# EAGLE board hap (EAGLE 7.1.0)
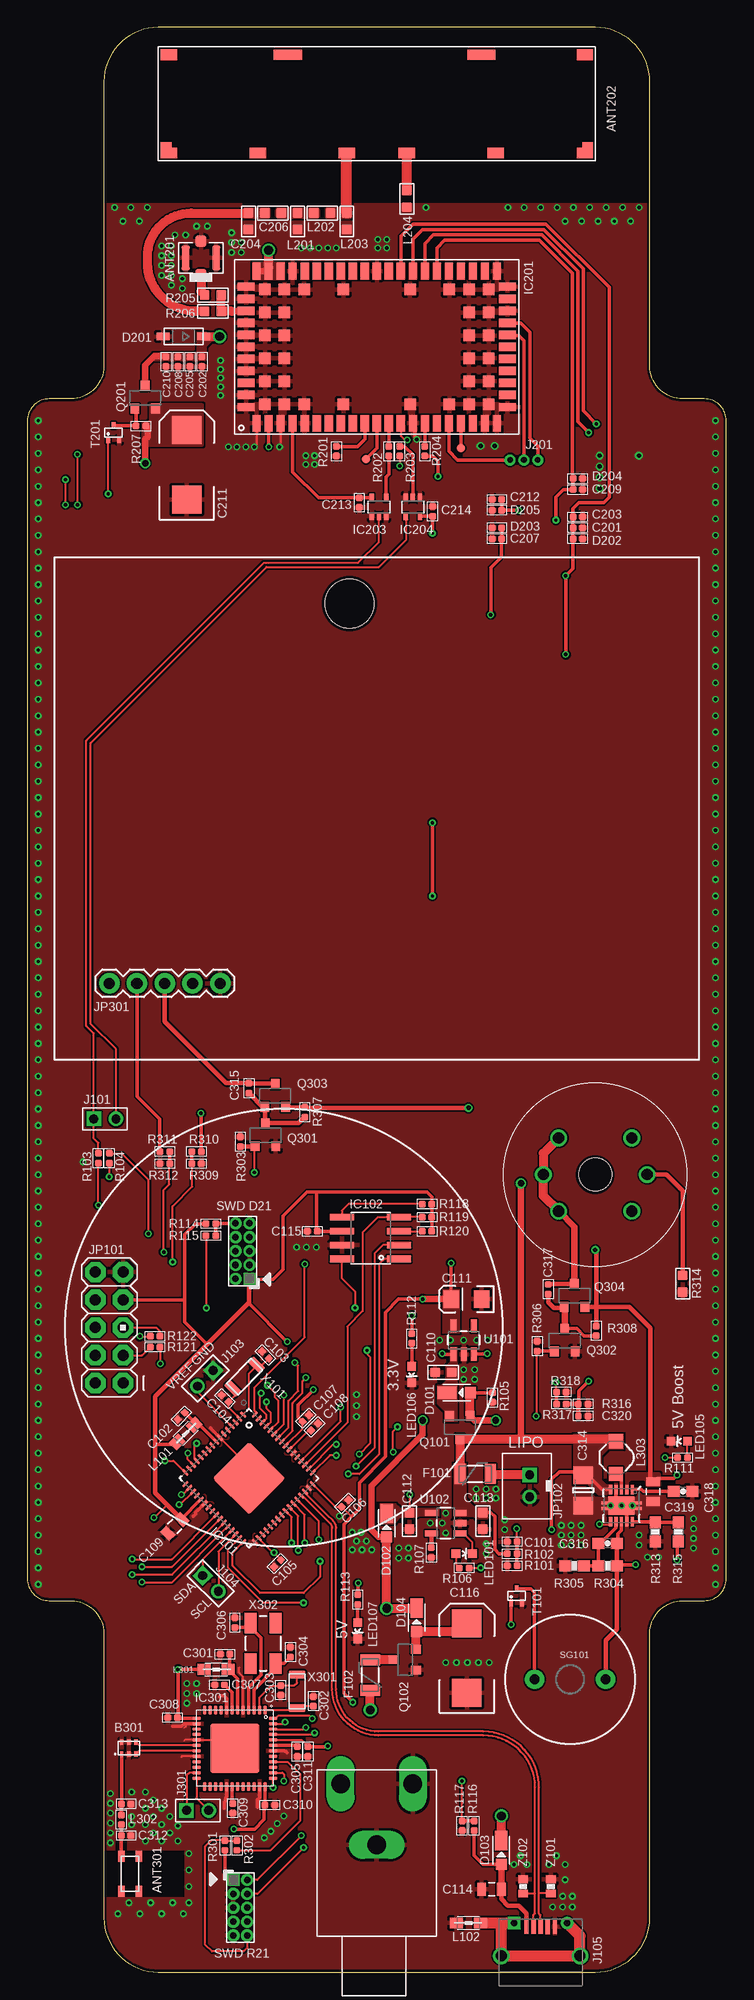
[diagram p0: board, top side]
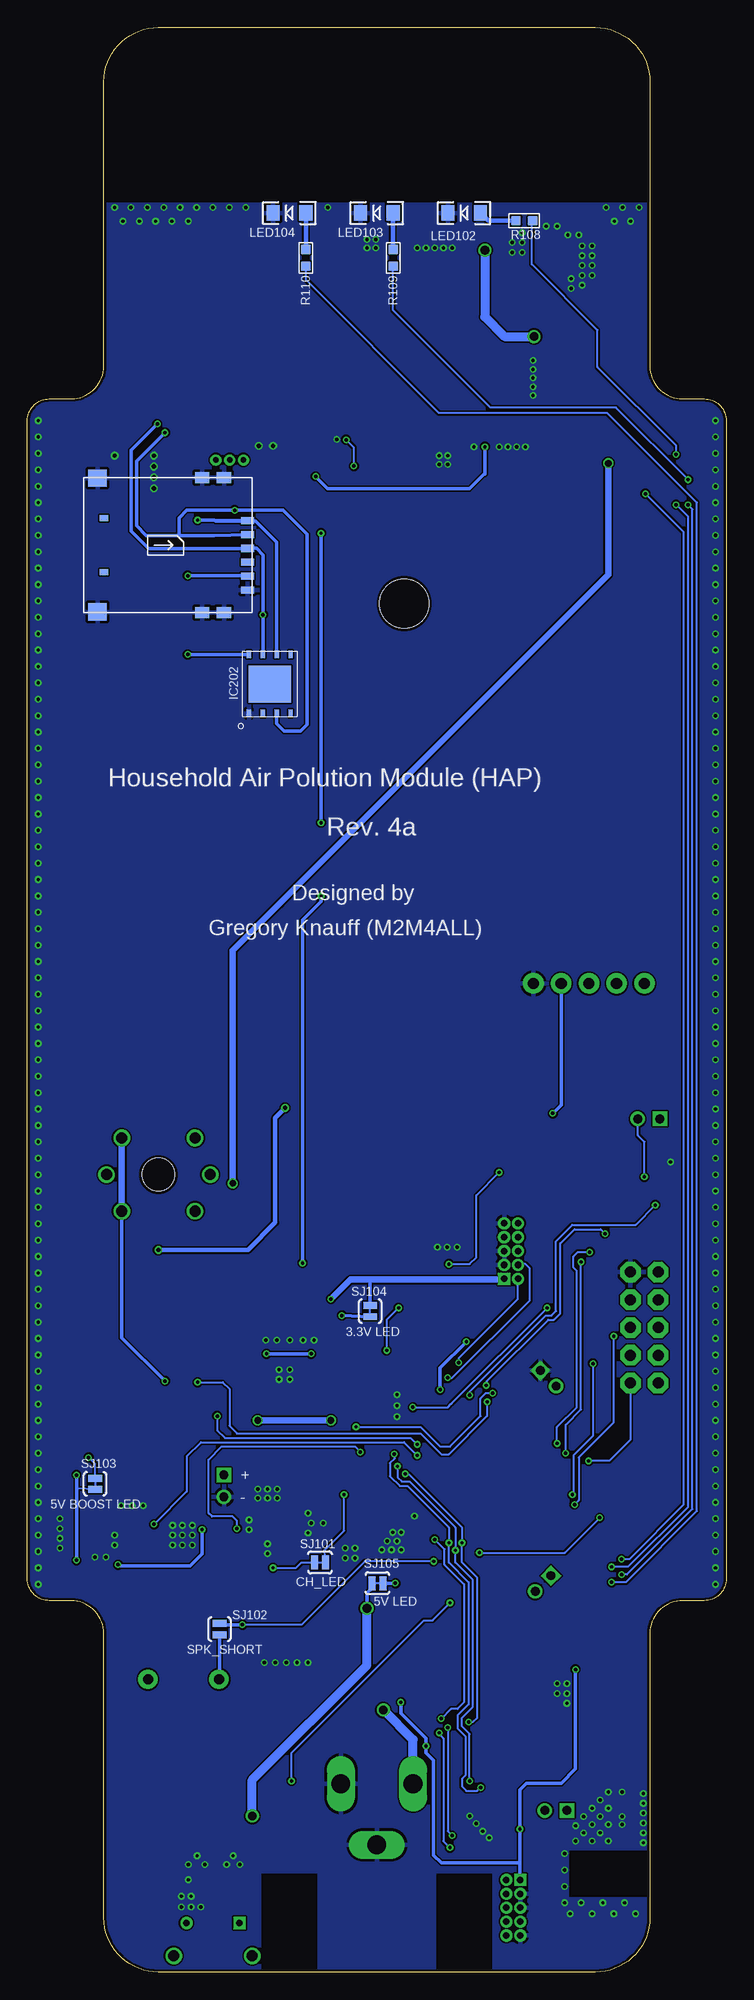
[diagram p1: board, bottom side, seen from below]

Size 64 x 178 mm. Coordinates in mm from the lower left corner, seen from the top.
Outline: 7,173 7,147 arc-90 4,144 2,144 arc90 0,142 0,36 arc90 2,34 4,34 arc-90 7,31 7,5 arc90 12,0 52,0 arc90 57,5 57,31 arc-90 60,34 62,34 arc90 64,36 64,142 arc90 62,144 60,144 arc-90 57,147 57,173 arc90 52,178 12,178 arc90 7,173
Copper layers (1*16): Top 0.035mm / dielectric 1.5mm / Bottom 0.035mm
Design rules "SeeedStudio_2layer_DRU_no_angle_20140221": minimum track width 6mil, minimum drill 12mil, track to track 6mil, track to pad 6mil, pad to pad 6mil, via to via 6mil, smd to smd 0mil, copper to edge 10mil, drill to drill 10mil, minimum pad ring 10mil, minimum via ring 6mil, stop-mask expansion 2mil, vias tented up to drill 100mil, thermal gap 10mil
Holes 4.5 mm at 29.5,125.25
tKeepout: area 0,34 to 2,144; area 62,34 to 64,144

## Footprints (pad centres in the part's own frame; a part is rotated, then mirrored left to right if it is on the bottom)
4P-U-FL = smd 1.016 x 1.016: D -1.524,0; GND3 1.524,0 | smd 2.286 x 0.762: GND1 0,1.397; GND2 0,-1.397
A10393 = smd 1 x 1.5: 1 4.5,-2.745; 2 4.5,2.745; 3 4.5,10.895; 4 4.5,-10.895; 5 4.5,-19.05; 8 4.5,19.05; 9 -4.5,-19.05; 10 -4.5,19.05 | smd 1.5 x 1: 6 4.25,-19.3; 7 4.25,19.3 | smd 0.9 x 2.6: 11 -4.5,9.58; 12 -4.5,-8.14
2450AT18D0100 = smd 1 x 0.6: 1 -1.6,-0.8; 2 1.6,-0.8; 3 1.6,0.8; 4 -1.6,0.8
BALUN = smd 0.3 x 0.5: 1 -0.65,-0.55; 2 0,-0.55; 3 0.65,-0.55; 4 0.65,0.55; 5 0,0.55; 6 -0.65,0.55
C0402 = smd 0.635 x 0.635: 1 -0.445,0; 2 0.445,0
0805 = smd 0.8 x 1.2: 1 -0.9,0; 2 0.9,0
C0603 = smd 0.889 x 0.889: 1 -0.762,0; 2 0.762,0
EIA3216 = smd 1.4 x 1.6: A 1.4,0; C -1.4,0
EIA7343 = smd 2.55 x 2.7: A 3.17,0; C -3.17,0
1206 = smd 1.6 x 1.8: 1 -1.4,0; 2 1.4,0
0603-CAP = smd 1.1 x 1: 1 -0.85,0; 2 0.85,0
PINHEAD_2X05_127 = drill 0.6 pad 1.016 square: 1 -0.635,2.54 | drill 0.6 pad 1.016: 2 0.635,2.54; 3 -0.635,1.27; 4 0.635,1.27; 5 -0.635,0; 6 0.635,0; 7 -0.635,-1.27; 8 0.635,-1.27; 9 -0.635,-2.54; 10 0.635,-2.54
D1005 = smd 1.016 x 1.016: + -1.27,0 | smd 1.778 x 1.143: - 0.889,0
SOD-123 = smd 1.2 x 0.7: A 1.85,0; C -1.85,0
R0402 = smd 0.635 x 0.635: 1 -0.445,0; 2 0.445,0
PTC-1206 = smd 1 x 1.8: 1 -1.4,0; 2 1.4,0
QFN64 = smd 4.7 x 4.7: 0 0,0 | smd 0.7 x 0.25: 1 -4.5,3.75; 2 -4.5,3.25; 3 -4.5,2.75; 4 -4.5,2.25; 5 -4.5,1.75; 6 -4.5,1.25; 7 -4.5,0.75; 8 -4.5,0.25; 9 -4.5,-0.25; 10 -4.5,-0.75; 11 -4.5,-1.25; 12 -4.5,-1.75; 13 -4.5,-2.25; 14 -4.5,-2.75; 15 -4.5,-3.25; 16 -4.5,-3.75; 33 4.5,-3.75; 34 4.5,-3.25; 35 4.5,-2.75; 36 4.5,-2.25; 37 4.5,-1.75; 38 4.5,-1.25; 39 4.5,-0.75; 40 4.5,-0.25; 41 4.5,0.25; 42 4.5,0.75; 43 4.5,1.25; 44 4.5,1.75; 45 4.5,2.25; 46 4.5,2.75; 47 4.5,3.25; 48 4.5,3.75 | smd 0.25 x 0.7: 17 -3.75,-4.5; 18 -3.25,-4.5; 19 -2.75,-4.5; 20 -2.25,-4.5; 21 -1.75,-4.5; 22 -1.25,-4.5; 23 -0.75,-4.5; 24 -0.25,-4.5; 25 0.25,-4.5; 26 0.75,-4.5; 27 1.25,-4.5; 28 1.75,-4.5; 29 2.25,-4.5; 30 2.75,-4.5; 31 3.25,-4.5; 32 3.75,-4.5; 49 3.75,4.5; 50 3.25,4.5; 51 2.75,4.5; 52 2.25,4.5; 53 1.75,4.5; 54 1.25,4.5; 55 0.75,4.5; 56 0.25,4.5; 57 -0.25,4.5; 58 -0.75,4.5; 59 -1.25,4.5; 60 -1.75,4.5; 61 -2.25,4.5; 62 -2.75,4.5; 63 -3.25,4.5; 64 -3.75,4.5
SO08 = smd 0.61 x 2.21: 1 -1.905,-2.616; 2 -0.635,-2.616; 3 0.635,-2.616; 4 1.905,-2.616; 5 1.905,2.616; 6 0.635,2.616; 7 -0.635,2.616; 8 -1.905,2.616
SARA-U2 = smd 0.75 x 1.55: 1 2,1; 2 3.1,1; 3 4.2,1; 4 5.3,1; 5 6.4,1; 6 7.5,1; 7 8.6,1; 8 9.7,1; 9 10.8,1; 10 11.9,1; 11 13,1; 12 14.1,1; 13 15.2,1; 14 16.3,1; 15 17.4,1; 16 18.5,1; 17 19.6,1; 18 20.7,1; 19 21.8,1; 20 22.9,1; 21 24,1; 33 24,14.95; 34 22.9,14.95; 35 21.8,14.95; 36 20.7,14.95; 37 19.6,14.95; 38 18.5,14.95; 39 17.4,14.95; 40 16.3,14.95; 41 15.2,14.95; 42 14.1,14.95; 43 13,14.95; 44 11.9,14.95; 45 10.8,14.95; 46 9.7,14.95; 47 8.6,14.95; 48 7.5,14.95; 49 6.4,14.95; 50 5.3,14.95; 51 4.2,14.95; 52 3.1,14.95; 53 2,14.95 | smd 1.55 x 0.75: 22 24.95,2.5; 23 24.95,3.6; 24 24.95,4.7; 25 24.95,5.8; 26 24.95,6.9; 27 24.95,8; 28 24.95,9.1; 29 24.95,10.2; 30 24.95,11.3; 31 24.95,12.4; 32 24.95,13.5; 54 1.05,13.5; 55 1.05,12.4; 56 1.05,11.3; 57 1.05,10.2; 58 1.05,9.1; 59 1.05,8; 60 1.05,6.9; 61 1.05,5.8; 62 1.05,4.7; 63 1.05,3.6; 64 1.05,2.5 | smd 1.05 x 1.05: 65 2.75,2.75; 66 2.75,4.85; 67 2.75,6.95; 68 2.75,9.05; 69 2.75,11.15; 70 2.75,13.25; 71 4.55,2.75; 72 4.55,4.85; 73 4.55,6.95; 74 4.55,9.05; 75 4.55,11.15; 76 4.55,13.25; 77 6.35,2.75; 78 6.35,13.25; 79 9.95,2.75; 80 9.95,13.25; 81 16.05,2.75; 82 16.05,13.25; 83 19.65,2.75; 84 19.65,13.25; 85 21.45,2.75; 86 21.45,4.85; 87 21.45,6.95; 88 21.45,9.05; 89 21.45,11.15; 90 21.45,13.25; 91 23.25,2.75; 92 23.25,4.85; 93 23.25,6.95; 94 23.25,9.05; 95 23.25,11.15; 96 23.25,13.25
DFN8 = smd 0.7 x 0.4: 1 -2.7,1.905; 2 -2.7,0.635; 3 -2.7,-0.635; 4 -2.7,-1.905; 5 2.7,-1.905; 6 2.7,-0.635; 7 2.7,0.635; 8 2.7,1.905 | smd 3.4 x 3.9: 9 0,0
SC70-5 = smd 0.4 x 0.7: 1 -0.65,-0.85; 2 0,-0.85; 3 0.65,-0.85; 4 0.65,0.85; 5 -0.65,0.85
QFN48_SMALL-CPAD = smd 4.5 x 4.5: 0 0,0 | smd 0.3 x 0.8: 1 -2.75,-3.5; 2 -2.25,-3.5; 3 -1.75,-3.5; 4 -1.25,-3.5; 5 -0.75,-3.5; 6 -0.25,-3.5; 7 0.25,-3.5; 8 0.75,-3.5; 9 1.25,-3.5; 10 1.75,-3.5; 11 2.25,-3.5; 12 2.75,-3.5; 25 2.75,3.5; 26 2.25,3.5; 27 1.75,3.5; 28 1.25,3.5; 29 0.75,3.5; 30 0.25,3.5; 31 -0.25,3.5; 32 -0.75,3.5; 33 -1.25,3.5; 34 -1.75,3.5; 35 -2.25,3.5; 36 -2.75,3.5 | smd 0.8 x 0.3: 13 3.5,-2.75; 14 3.5,-2.25; 15 3.5,-1.75; 16 3.5,-1.25; 17 3.5,-0.75; 18 3.5,-0.25; 19 3.5,0.25; 20 3.5,0.75; 21 3.5,1.25; 22 3.5,1.75; 23 3.5,2.25; 24 3.5,2.75; 37 -3.5,2.75; 38 -3.5,2.25; 39 -3.5,1.75; 40 -3.5,1.25; 41 -3.5,0.75; 42 -3.5,0.25; 43 -3.5,-0.25; 44 -3.5,-0.75; 45 -3.5,-1.25; 46 -3.5,-1.75; 47 -3.5,-2.25; 48 -3.5,-2.75
2P-2.0 = drill 0.813 pad 1.27 square: 1 -1.016,0 | drill 0.813 pad 1.27: 2 1.016,0
ZX62D-B-5P8 = smd 0.4 x 1.35: P$1 -1.3,2.675; P$2 -0.65,2.675; P$3 0,2.675; P$4 0.65,2.675; P$5 1.3,2.675 | drill 0.6 pad 1 square: SH1 -2.425,3 | drill 0.6 pad 1: SH2 2.425,3 | drill 1 pad 1.4: SH3 -3.6,0; SH4 3.6,0
712-22-23_RA = drill 1.702 long: CENTER_PIN 13.945,8.763; SLEEVE 8.357,5.461; SLEEVE_SHUNT 13.945,2.159
1X03_1.27MM_NOSILK = drill 0.508 pad 1: 1 0,0; 2 1.27,0; 3 2.54,0
AVR_ICSP = drill 1.016 pad 1.88 octagon: 1 -1.27,5.08; 2 1.27,5.08; 3 -1.27,2.54; 4 1.27,2.54; 5 -1.27,0; 6 1.27,0; 7 -1.27,-2.54; 8 1.27,-2.54; 9 -1.27,-5.08; 10 1.27,-5.08
JST_EPH_B2B-PH-K-S = drill 0.813 square: 1 2,0 | drill 0.813: 2 0,0
1X05 = drill 1.016 pad 1.88: 1 0,0; 2 2.54,0; 3 5.08,0; 4 7.62,0; 5 10.16,0
0805' = smd 1.2 x 1: 1 -1.1,0; 2 1.1,0
R0603 = smd 0.889 x 0.889: 1 -0.762,0; 2 0.762,0
L0402 = smd 0.635 x 0.635: 1 -0.445,0; 2 0.445,0
CDRH2D09 = smd 1.3 x 1.3: P$1 -1.5,0; P$2 1.5,0
LED-0603 = smd 0.8 x 0.8: A 0,-0.75; C 0,0.75
LED-1206 = smd 1.2 x 1.4: A -1.5,0; C 1.5,0
SOT23-S-PADS = smd 0.8 x 0.9: 1 -0.95,-1; 2 0.95,-1; 3 0,1.1
0603-RES = smd 1.1 x 1: 1 -0.85,0; 2 0.85,0
MQ-3 = drill 1.016: A1 -3.35,3.35; A2 -3.35,-3.35; B1 3.35,3.35; B2 3.35,-3.35; HA -4.75,0; HB 4.75,0 | hole 3: 0,0
BUZZER-12MM = drill 0.9 pad 1.778: + 3.25,0; - -3.25,0
SJ_2S_NC = smd 0.635 x 1.27: 1 -0.508,0; 2 0.508,0
SJ_2S_NO = smd 0.635 x 1.27: 1 -0.508,0; 2 0.508,0
SC-75-3 = smd 0.35 x 0.6: 1 -0.5,-0.647; 2 0.5,-0.647; 3 0,0.647
PAD.03X.03 = smd 0.762 x 0.762: P$1 0,0
SOT23-5 = smd 0.55 x 1.2: 1 -0.95,-1.3; 2 0,-1.3; 3 0.95,-1.3; 4 0.95,1.3; 5 -0.95,1.3
MICRO-SIM = smd 1.15 x 0.65: C1 -2.17,9.025; C2 -2.17,6.485; C3 -2.17,3.945; C5 -2.17,10.295; C6 -2.17,7.755; C7 -2.17,5.215 | smd 1.3 x 1: GND@0 0,12.37; GND@1 2,12.37; GND@4 2,0; GND@5 0,0 | smd 1.7 x 1.6: GND@2 11.56,12.31; GND@3 11.56,0.06 | smd 0.8 x 0.54: P$13 10.98,3.73; P$14 10.98,8.65
QFN-10_PAD = smd 0.297 x 0.85: 1 -1,-1.475; 2 -0.5,-1.475; 3 0,-1.475; 4 0.5,-1.475; 5 1,-1.475; 6 1,1.475; 7 0.5,1.475; 8 0,1.475; 9 -0.5,1.475; 10 -1,1.475 | smd 0.7 x 0.28: 11 -1.5,0.25; 12 -1.5,-0.25; 13 1.5,0.25; 14 1.5,-0.25 | smd 2.4 x 1.65: 15 0,0
2P-SMD-3.2X1.5 = smd 0.762 x 1.524: 1 -1.524,0; 2 1.524,0
CRYSTAL-SMD-5X3 = smd 1.9 x 1.1: 1 -1.85,-1.15; 2 1.85,-1.15; 3 1.85,1.15; 4 -1.85,1.15
0402-RES = smd 0.7 x 0.9: 1 -0.65,0; 2 0.65,0

## Placement (x,y rotation side)
ANT201  [4P-U-FL]  15.9,156.9 90 top
ANT202  A10393 (N.C.)  [A10393]  32,171 270 top
ANT301  2450AT18D0100  [2450AT18D0100]  9.4,9 270 top
B301  BALUN  [BALUN]  9.3,20.5 0 top
C101  100nF  [C0402]  44.4,39.4 0 top
C102  100nF  [C0402]  14.1,50.9 225 top
C103  15pF  [C0402]  21.8,56.5 315 top
C104  15pF  [C0402]  18.1,52.5 135 top
C105  100nF  [C0402]  22.9,37.4 45 top
C106  100nF  [C0402]  29.1,42.9 225 top
C107  100nF  [C0402]  25.5,50.7 225 top
C108  100nF  [C0402]  26.3,49.9 225 top
C109  22uF  [0805]  13.5,40.8 45 top
C110  1uF  [C0603]  38.1,54.9 0 top
C111  100uF  [EIA3216]  40.2,61.6 180 top
C112  4.7uF  [C0603]  35,41.3 270 top
C113  4.7uF  [C0603]  41.7,41.3 270 top
C114  22uF  [0805]  42.5,7.6 180 top
C115  100nF  [C0402]  26.1,67.8 0 top
C116  330uF  [EIA7343]  40.25,28.75 90 top
C201  100nF  [C0402]  50.4,132.2 180 top
C202  15pF  [C0402]  16,147.4 90 top
C203  47pF  [C0402]  50.4,133.2 180 top
C204  33pF 5% (N.C.)  [C0603]  20.25,160.25 270 top
C205  56pF  [C0402]  14.9,147.4 90 top
C206  2.2pF (+-0.1pF)(N.C.)  [C0603]  22.5,161 0 top
C207  47pF  [C0402]  43,131.2 0 top
C208  10nF  [C0402]  13.8,147.4 90 top
C209  47pF  [C0402]  50.4,135.7 180 top
C210  100nF  [C0402]  12.7,147.4 90 top
C211  330uF  [EIA7343]  14.6,137.95 90 top
C212  47pF  [C0402]  43,134.8 0 top
C213  100nF  [C0402]  30.4,134.5 90 top
C214  100nF  [C0402]  37.1,133.7 270 top
C301  100nF  [C0402]  18.1,29.1 180 top
C302  15pF  [C0402]  26.2,24.8 270 top
C303  15pF  [C0402]  23.2,25.8 270 top
C304  15pF  [C0402]  24.1,29.3 90 top
C305  100nF  [C0402]  25.7,20.2 90 top
C306  15pF  [C0402]  19,32 90 top
C307  100nF  [C0402]  17.6,26.3 180 top
C308  100nF  [C0402]  13.3,23.3 0 top
C309  100nF  [C0402]  18.8,15 270 top
C310  100nF  [C0402]  22.2,15.3 180 top
C311  100nF  [C0402]  24.7,20.2 270 top
C312  22pF  [C0402]  9.05,12.5 0 top
C313  1.2pF  [C0402]  9.05,15.4 0 top
C314  10uF  [1206]  50.9,44.1 270 top
C315  1uF  [C0402]  20.3,80.9 270 top
C316  100nF  [0603-CAP]  53.15,39.25 180 top
C317  1uF  [C0402]  47.7,62.5 270 top
C318  100nF  [0603-CAP]  60.05,44 0 top
C319  22uF  [0805]  57.3,44 270 top
C320  100nF  [C0402]  50.9,50.9 0 top
CN101  PINHEAD-2x5-P1.27  [PINHEAD_2X05_127]  19.7,66 180 top
CN301  PINHEAD-2x5-P1.27  [PINHEAD_2X05_127]  19.5,5.9 0 top
D101  MSS1P2L  [D1005]  39.31,53.04 180 top
D102  MSS1P2L  [D1005]  32.9,41.1 90 top
D103  MSS1P2L  [D1005]  43.4,11.15 90 top
D104  MSS1P2L  [D1005]  35.65,32.45 90 top
D201  MMSZ5231BT1G  [SOD-123]  14.3,149.7 180 top
D202  PESD0402-140  [R0402]  50.4,131.2 0 top
D203  PESD0402-140  [R0402]  43,132.2 180 top
D204  PESD0402-140  [R0402]  50.4,136.7 0 top
D205  PESD0402-140  [R0402]  43,133.8 180 top
F101  0R  [PTC-1206]  41,45.6 0 top
F102  PTCSMD  [PTC-1206]  31.4,27.2 90 top
IC101  ATSAMD21J18-MU  [QFN64]  20.3,45.2 315 top
IC102  AT45DB161E  [SO08]  31.43,67.18 90 top
IC201  UBLOX_SARA_U2STANDARD  [SARA-U2]  19,140.75 0 top
IC202  SIM_CHIP  [DFN8]  41.8,117.9 90 bottom
IC203  74LVC1G125DCK  [SC70-5]  32.2,134.1 0 top
IC204  74LVC1G125DCK  [SC70-5]  35.3,134.1 180 top
IC301  ATSAMR21G18  [QFN48_SMALL-CPAD]  19,20.5 180 top
J101  [2P-2.0]  7.1,78.1 0 top
J103  [2P-2.0]  16.3,54.35 225 top
J104  [2P-2.0]  16.77,35.58 315 top
J105  [ZX62D-B-5P8]  47,1.5 0 top
J106  DC-005  [712-22-23_RA]  37.45,3.3 90 top
J201  1X03_1.27MM  [1X03_1.27MM_NOSILK]  44.2,138.4 0 top
J301  [2P-2.0]  15.6,14.8 0 top
JP101  M05X2PTH  [AVR_ICSP]  7.5,59 180 top
JP102  JST_EPH_2PIN  [JST_EPH_B2B-PH-K-S]  46,43.5 90 top
JP301  [1X05]  7.5,90.5 0 top
L101  MH2029-300Y  [0805']  14.5,49.3 225 top
L102  MH2029-300Y  [0805']  40.4,4.5 0 top
L201  10nH 5% (N.C.)  [R0603]  24.75,160.25 270 top
L202  3.3nH (+-0.3nH)(N.C.)  [R0603]  27,161 0 top
L203  N.C.  [R0603]  29.25,160.25 270 top
L204  0R (N.C.)  [R0603]  34.75,162.3 90 top
L301  MH2029-300Y  [0805']  17.3,27.7 180 top
L302  1.8nH  [L0402]  8.6,13.95 90 top
L303  4.7uH, 1.2A  [CDRH2D09]  53.9,47.1 90 top
LED101  Yellow  [LED-0603]  40,38.3 270 top
LED102  Yellow  [LED-1206]  24,161 180 bottom
LED103  Yellow  [LED-1206]  32,161 180 bottom
LED104  Green  [LED-1206]  40,161 180 bottom
LED105  Red  [LED-0603]  59.7,48.6 90 top
LED106  Red  [LED-0603]  35.2,54.7 180 top
LED107  Red  [LED-0603]  30.25,31.25 180 top
Q101  FDN340P  [SOT23-S-PADS]  39.6,49.9 180 top
Q102  FDN340P  [SOT23-S-PADS]  34.6,28.6 90 top
Q201  FDN340P  [SOT23-S-PADS]  10.8,144.1 0 top
Q301  2N7002  [SOT23-S-PADS]  21.8,76.6 0 top
Q302  2N7002  [SOT23-S-PADS]  49.2,57.8 0 top
Q303  FDN340P  [SOT23-S-PADS]  22.7,80.2 0 top
Q304  FDN340P  [SOT23-S-PADS]  50.1,61.9 0 top
R101  4.7M  [R0402]  44.4,38.3 180 top
R102  10M  [R0402]  44.4,37.2 0 top
R103  1k  [R0402]  6.5,74.5 90 top
R104  33R  [R0402]  7.5,74.5 90 top
R105  100k  [R0402]  42.6,52.6 90 top
R106  1k  [R0402]  40,37 180 top
R107  2k  [R0402]  37,38.4 270 top
R108  220R  [R0603]  18.5,160.3 180 bottom
R109  220R  [R0603]  30.5,156.9 90 bottom
R110  220R  [R0603]  38.5,156.9 90 bottom
R111  1k  [R0402]  60,47.1 0 top
R112  1k  [R0402]  35.2,58 270 top
R113  1k  [R0402]  30.25,34.1 270 top
R114  100k  [R0402]  16.8,68.5 0 top
R115  330R  [R0402]  16.8,67.4 180 top
R116  3M  [R0402]  40.9,13.4 90 top
R117  4.7M  [R0402]  39.8,13.4 270 top
R118  100k  [R0402]  36.6,70.3 0 top
R119  100k  [R0402]  36.6,69.1 0 top
R120  100k  [R0402]  36.6,67.8 0 top
R121  0R  [R0402]  11.7,57.2 0 top
R122  0R  [R0402]  11.7,58.2 0 top
R201  0R  [R0402]  28.3,139.2 270 top
R202  0R  [R0402]  33.1,139.2 270 top
R203  0R  [R0402]  34.1,139.2 90 top
R204  100k  [R0402]  36.4,139.2 270 top
R205  0R  [R0603]  17,153.5 0 top
R206  0R (N.C.)  [R0603]  17,152 180 top
R207  10k  [R0402]  10.4,141.5 180 top
R301  100k  [R0402]  18.1,11.6 90 top
R302  330R  [R0402]  19.2,11.6 270 top
R303  10k  [R0402]  19.5,76 270 top
R304  2M  [0603-RES]  53.15,37.2 0 top
R305  220k  [0603-RES]  50.1,37.2 0 top
R306  10k  [R0402]  46.7,57.3 270 top
R307  10k  [R0402]  25.4,78.7 90 top
R308  10k  [R0402]  52.1,58.7 90 top
R309  1M  [R0402]  15.5,75.1 180 top
R310  2M  [R0402]  15.5,74 0 top
R311  1M  [R0402]  12.6,75.1 0 top
R312  2M  [R0402]  12.6,74 180 top
R313  220k  [0603-RES]  57.5,40.3 90 top
R314  5R1  [R0603]  60,63 90 top
R315  2M  [0603-RES]  59.6,40.3 270 top
R316  1k (DNP)  [R0402]  50.9,52 180 top
R317  1M  [R0402]  48.9,52 180 top
R318  2M  [R0402]  48.9,53.1 0 top
SENS301  METHANE_SENSOR  [MQ-3]  52,73 0 top
SG101  BUZZERPTH  [BUZZER-12MM]  49.7,26.8 0 top
SJ101  SOLDERJUMPER_NC  [SJ_2S_NC]  37.2,37.5 0 bottom
SJ102  SOLDERJUMPER_NO  [SJ_2S_NO]  46.4,31.4 90 bottom
SJ103  SOLDERJUMPER_NC  [SJ_2S_NC]  57.8,44.7 270 bottom
SJ104  SOLDERJUMPER_NC  [SJ_2S_NC]  32.6,60.5 90 bottom
SJ105  SOLDERJUMPER_NC  [SJ_2S_NC]  31.95,35.6 180 bottom
T101  DTC114YE  [SC-75-3]  44.8,34.45 0 top
T201  DTC114YE  [SC-75-3]  7.9,140.9 0 top
TP1  TEST-POINT3  [PAD.03X.03]  31,138.5 0 top
TP2  TEST-POINT3  [PAD.03X.03]  39.7,139.5 0 top
U101  XC6220  [SOT23-5]  39.96,57.86 0 top
U102  MCP73831  [SOT23-5]  38.3,41.1 90 top
U201  MICRO-SIM  [MICRO-SIM]  46,136.8 180 bottom
U301  TPS61200  [QFN-10_PAD]  54.4,42.7 180 top
X101  32.768 kHz  [2P-SMD-3.2X1.5]  19.9,54.5 225 top
X301  32.768 kHz  [2P-SMD-3.2X1.5]  24.7,25.7 90 top
X302  16MHz  [CRYSTAL-SMD-5X3]  21.6,30.1 90 top
Z101  CG0402MLC-05LG  [0402-RES]  47.95,7.85 270 top
Z102  CG0402MLC-05LG  [0402-RES]  45.4,7.85 270 top

## Library data of the parts
ANT201 J101 J103 J104 J301 = Seeed_Connector
ANT202 ANT301 B301 C101-C108 C110 C112 C113 C115 C201-C210 C212-C214 C301-C313 C315 C317 C320 D202-D205 IC101 IC202 IC301 J106 J201 L201-L204 L302 Q101 Q102 Q201 Q301-Q304 R101-R122 R201-R207 R301-R303 R306-R312 R314 R316-R318 SJ101-SJ105 T101 T201 = gknff
C109 C114 C314 C319 = CH_passive
C111 C116 C211 = SparkFun-Capacitors
C316 C318 L303 R304 R305 R313 R315 U301 = SparkFun
CN101 CN301 = Connettori
D101-D104 = Seeedstudio_Discrete_2
D201 = adafruit
F101 F102 = SparkFun-PowerIC; PROD_ID: RES-11150
IC102 = SparkFun-DigitalIC
IC201 = ublox
IC203 IC204 = 74xx-little-de
J105 = j_usb_hirose_zx62d-b-5p8
JP101 JP301 = SparkFun-Connectors
JP102 = Daughterboard_XMEGA_A3BU_v1.0
L101 L102 L301 = Protezione; MONTHLY_USAGE: _____; PART_NUMBER: BLM21PG300SN1D_/_MH2029-300Y; PRICE: _____; SUPPLIER: _____; TYPE: Protezione
LED101-LED107 = SparkFun-LED
SENS301 = SparkFun-Sensors
SG101 = SparkFun-Electromechanical
TP1 TP2 = SparkFun-Passives
U101 = SparkFun-PowerIC
U102 = SparkFun-PowerIC; PROD_ID: IC-09995
U201 = GPRSbee
X101 X301 = Seeed_Discrete
X302 = SparkFun-FreqCtrl
Z101 Z102 = SparkFun-DiscreteSemi

## Nets
1.8V: C213.2 IC201.4 IC203.5
3.3V: C105.2 C106.2 C107.2 C109.2 C111.A C115.2 C214.2 C305.2 C308.2 C310.2 CN101.1 CN301.1 IC101.21 IC101.34 IC101.48 IC101.56 IC102.6 IC204.5 IC301.13 IC301.36 IC301.44 JP101.7 L101.2 L301.2 R114.1 R118.2 R119.2 R120.2 R301.1 SJ104.2 U101.5
5V: D101.+ D102.+ D103.- D104.- Q101.1 R105.2 SJ105.2
5V_EN: IC101.49 U301.6
+5V: C319.1 Q303.2 Q304.2 R307.2 R308.2 R315.2 SJ103.2 U301.2
BAT_VOLT: C101.2 IC101.62 R101.1 R102.2
CO2_AOUT: IC101.16 JP101.1
CO_AOUT: IC101.61 R317.2 R318.1
CO_DOUT: IC101.17
CO_SW: IC101.50 Q302.1 R306.2
FB: R313.2 R315.1 U301.10
GND: ANT201.GND1 ANT201.GND2 ANT201.GND3 ANT301.2 ANT301.3 ANT301.4 B301.2 B301.5 B301.6 C101.1 C102.2 C103.1 C104.2 C105.1 C106.1 C107.1 C108.1 C109.1 C110.1 C111.C C112.2 C113.2 C114.2 C115.1 C116.C C201.1 C202.1 C203.1 C204.2 C205.1 C207.1 C208.1 C209.1 C210.1 C211.C C212.1 C213.1 C214.1 C301.2 C302.1 C303.2 C304.2 C305.1 C306.2 C307.2 C308.1 C309.2 C310.1 C311.2 C312.2 C313.2 C314.2 C318.2 C319.2 C320.2 CN101.3 CN101.5 CN101.9 CN301.3 CN301.5 CN301.9 D201.A D202.2 D203.2 D204.2 D205.2 IC101.0 IC101.7 IC101.22 IC101.33 IC101.47 IC101.54 IC102.7 IC201.1 IC201.3 IC201.5 IC201.14 IC201.20 IC201.21 IC201.22 IC201.30 IC201.32 IC201.33 IC201.43 IC201.50 IC201.54 IC201.55 IC201.57 IC201.58 IC201.59 IC201.60 IC201.61 IC201.63 IC201.64 IC201.65 IC201.66 IC201.67 IC201.68 IC201.69 IC201.70 IC201.71 IC201.72 IC201.73 IC201.74 IC201.75 IC201.76 IC201.77 IC201.78 IC201.79 IC201.80 IC201.81 IC201.82 IC201.83 IC201.84 IC201.85 IC201.86 IC201.87 IC201.88 IC201.89 IC201.90 IC201.91 IC201.92 IC201.93 IC201.94 IC201.95 IC201.96 IC202.1 IC203.1 IC203.3 IC204.1 IC204.3 IC301.0 IC301.5 IC301.8 IC301.14 IC301.17 IC301.20 IC301.29 IC301.35 IC301.42 J103.1 J105.P$5 J106.SLEEVE J106.SLEEVE_SHUNT JP101.9 JP102.2 JP301.5 L102.1 L201.2 L203.2 L204.1 LED102.C LED103.C LED104.C LED105.C LED106.C LED107.C Q102.1 Q301.2 Q302.2 R102.1 R105.1 R107.2 R117.2 R201.2 R303.1 R305.1 R306.1 R310.2 R312.2 R313.1 R314.1 R316.1 R318.2 T101.2 T201.2 U101.2 U102.2 U201.C5 U201.GND@0 U201.GND@1 U201.GND@2 U201.GND@3 U201.GND@4 U201.GND@5 U301.4 U301.9 U301.11 U301.12 U301.13 U301.14 U301.15 Z101.1 Z102.1
LED1: IC101.26 R108.1
LED2: IC101.27 R109.1
LED3: IC101.28 R110.1
LIPO_STAT: LED101.C U102.1
MISO: IC101.43 IC102.8 IC301.37
MOSI: IC101.41 IC102.1 IC301.47
N$1: IC102.5 R118.1
N$2: LED104.A R110.2
N$3: ANT301.1 C312.1 L302.1
N$4: LED103.A R109.2
N$5: IC102.3 R120.1
N$6: IC301.24 J301.2
N$7: B301.1 C313.1 L302.2
N$8: IC301.23 J301.1
N$9: IC201.56 R205.2 R206.1
N$10: F101.2 JP102.1
N$11: C110.2 D101.- Q101.2 U101.1 U101.3
N$12: ANT201.D R205.1
N$13: LED101.A R106.2
N$14: R107.1 U102.5
N$15: C112.1 D102.- SJ101.2 U102.4
N$16: R106.1 SJ101.1
N$17: C204.1 C206.1 R206.2
N$21: B301.4 IC301.18
N$22: B301.3 IC301.19
N$23: C206.2 L201.1 L202.1
N$24: IC201.15 R204.1
N$25: IC201.2 R204.2
N$26: Q201.1 R207.2 T201.3
N$27: IC201.10 R201.1
N$28: IC201.11 TP1.P$1
N$29: IC201.18 TP2.P$1
N$30: IC201.13 R203.1
N$31: IC201.12 R202.1
N$32: ANT202.1 L202.2 L203.1
N$33: C202.2 C205.2 C208.2 C210.2 D201.C IC201.51 IC201.52 IC201.53 Q201.3
N$34: ANT202.2 L204.2
N$36: R314.2 SENS301.HB
N$37: JP101.2
N$39: JP101.4
N$40: JP101.6
N$41: JP101.8
N$42: LED102.A R108.2
N$43: L303.P$1 U301.3
N$44: C318.1 U301.1
N$45: JP101.5 R122.2
N$46: JP101.3 R121.1
N$47: LED105.A R111.2
N$48: LED106.A R112.2
N$49: LED107.A R113.2
N$50: SG101.- SJ102.1 T101.3
N$51: IC101.32 SJ102.2 T101.1
N$54: F102.1 J106.CENTER_PIN
N$55: C114.1 D103.+ J105.P$1 R116.1
N$56: C116.A D104.+ Q102.2
N$60: IC101.59 R103.1
N$61: IC101.60 R104.2
N$62: F102.2 Q102.3
N$64: R113.1 SJ105.1
N$65: R112.1 SJ104.1
N$66: R111.1 SJ103.1
N$67: C317.1 Q304.3 SENS301.A1 SENS301.A2 SENS301.HA
N$68: C317.2 Q302.3 Q304.1 R308.1
N$70: C315.2 Q301.3 Q303.1 R307.1
N$71: C311.1 IC301.43
N$72: C309.1 IC301.30
N$73: C307.1 IC301.7
N$74: C302.2 IC301.1 X301.1
N$75: C303.1 IC301.2 X301.2
N$76: C301.1 IC301.6 L301.1
N$77: C304.1 IC301.3 X302.1
N$78: C306.1 IC301.4 X302.3
N$83: C315.1 JP301.3 Q303.3
N$88: C108.2 IC101.55
N$89: C102.1 IC101.8 L101.1
N$90: C103.2 IC101.1 X101.1
N$91: C104.1 IC101.2 X101.2
N$97: C320.1 R316.2 R317.1 SENS301.B1 SENS301.B2
N$98: JP301.4 R309.1
N$99: JP301.2 R311.1
PM_P1: IC101.13 R311.2 R312.1
PM_P2: IC101.14 R309.2 R310.1
PM_SW: IC101.64 Q301.1 R303.2
RESET_D21: CN101.10 R114.2 R115.1
RESET_R21: CN301.10 R301.2 R302.1
RESETN_D21: IC101.52 R115.2
RESETN_R21: IC301.40 R302.2
RXD0: IC204.4 J101.2 R104.1
RXD1: IC101.18 R121.2
RXD_1V8: IC204.2 R203.2
SCK: IC101.42 IC102.2 IC301.38
SCL: IC101.30 J104.2
SDA: IC101.29 J104.1
SH1: J105.SH1 J105.SH2 J105.SH3 J105.SH4 L102.2
SIM_CLK: C209.2 D204.1 IC201.38 IC202.6 U201.C3
SIM_DATA: C212.2 D205.1 IC201.39 IC202.3 U201.C7
SIM_RST: C207.2 D203.1 IC201.40 IC202.7 U201.C2
SIM_VDD: C201.2 C203.2 D202.1 IC201.41 IC202.8 U201.C1
SS_DFLASH: IC101.51 IC102.4 R119.1
SS_R21: IC101.44 IC301.48
SWCLK_D21: CN101.4 IC101.57
SWCLK_R21: CN301.4 IC301.45
SWDIO_D21: CN101.2 IC101.58
SWDIO_R21: CN301.2 IC301.46
TXD0: IC203.2 J101.1 R103.2
TXD1: IC101.19 R122.1
TXD_1V8: IC203.4 R202.2
U2_ON: IC101.25 T201.1
USB_D+: IC201.29 J201.3
USB_D-: IC201.28 J201.2
USB_N: IC101.45 J105.P$2 Z102.2
USB_P: IC101.46 J105.P$3 Z101.2
UVLO: C316.2 R304.1 R305.2 U301.7
V_BATT: C113.1 C211.A C314.1 C316.1 F101.1 L303.P$2 Q101.3 Q201.2 R101.2 R207.1 R304.2 SG101.+ U102.3 U301.5 U301.8
VBUS_DETECT: IC101.31 R116.2 R117.1
VREF: IC101.4 J103.2
VUSB: IC201.17 J201.1

## Tracks (layer width: path | path; a pad name or v marks a point on that pad's centre or on a via)
1.8V
  Top 0.305: IC203.5 C213.2 | C213.2 | IC201.4 24.3,137.3 26.65,134.95 C213.2
3.3V  (via drill 0.3)
  Top 0.203: IC301.44 25.09,21.25 C305.2 | IC101.48 28.22,42.59 C106.2 29.62,41.75 29.75,41.75 | C105.2 23.21,37.79 v22.6,38.4 22.5,38.4 IC101.34 | v11.6,41.6 12.79,42.79 | IC101.56 25.19,49.73 C107.2
  Top 0.305: IC204.5 C214.2 v37.1,131.7 | R114.1 15.4,68.5 14.4,67.5 14.4,61.4 | 14.4,61.4 14.4,59.5 16.45,57.45 | JP101.7 14.26,61.54 14.4,61.4 | 20.3,61.3 20.3,61.2 v23.8,57.7 | R120.2 R119.2 R118.2 37.04,70.96 36.6,71.4 26.5,71.4 | 26.5,71.4 25.6,71.4 23.4,69.2 23.4,64.3 22.5,63.4 20.39,63.4 CN101.1 | IC102.6 28.8,67.8 C115.2 26.5,67.84 26.5,71.4 | v38.8,64.9 C111.A | v37.1,105.2 v37.1,98.5 | v36.2,61.6 34,61.6 32.8,60.4 32.8,47.2 30.4,44.8 30.4,42.4 29.75,41.75 29,41 29,25.5 v29.8,24.7 | IC301.36 C310.2 21.7,15.24 21.7,14 20.8,13.1 v18.9,13.1 | IC301.13 13.79,23.25 C308.2 13.8,23.36 v13.8,27.7 L301.2 | 25.76,20.7 C305.2 27.45,20.64 v27.5,20.7 | R301.1 18.1,9.21 CN301.1 | L101.2 13.5,48.3 11.7,48.3 | IC101.21 14.14,41.51 C109.2 | v26.2,53.3 24.8,51.9 24.8,50.77 C107.2
  Top 0.406: CN101.1 20.3,63.42 20.3,61.3 16.45,57.45 11.7,52.7 11.7,48.3 11.7,43.87 12.79,42.79 C109.2
  Top 0.6: v36.2,61.6 C111.A
  Bottom 0.203: v22.6,38.4 14.8,38.4 v11.6,41.6
  Bottom 0.305: v26.2,53.3 26.2,55.3 v23.8,57.7 | v38.8,64.9 38.8,96.3 37.1,98 v37.1,98.5 | v37.1,131.7 v37.1,105.2 | SJ104.2 32.6,63.3 32.5,63.4 | v29.8,24.7 29.8,23.7 27.5,21.4 v27.5,20.7 27.5,20.1 26.8,19.4 26.8,10.7 26.1,10 18.9,10 | 18.9,10 18.9,8.47 CN301.1 | 18.9,10 v18.9,13.1 18.9,16.7 18.3,17.3 15.1,17.3 13.8,18.6 v13.8,27.7
  Bottom 0.6: v36.2,61.6 34.4,63.4 32.5,63.4 20.39,63.4 CN101.1
  pour Top (no thermals): 38.1,58.5 39.5,58.5 arc90 39.6,58.6 39.6,62.4 arc90 39.5,62.5 38.1,62.5 arc90 38,62.4 38,58.6 arc90
5V  (via drill 0.6, 0.8)
  Top 0.305: D101.+ R105.2
  Top 0.6: D102.+ 32.17,39.83 31.5,40.5 31.5,44.5 36.2,49.2 v36.2,50.5 | v42.9,50.5 40.95,50.5 Q101.1
  Top 0.813: D103.- v43.4,14.3 | D104.- 35.51,33.3 v32.9,33.3 D102.+ | Q101.1 40.55,53.01 D101.+
  Bottom 0.305: v32.9,33.3 32.9,34.7 32.5,35.1 32.5,35.46 SJ105.2
  Bottom 0.6: v36.2,50.5 v42.9,50.5
  Bottom 0.813: v32.9,33.3 32.9,28.1 43.4,17.6 v43.4,14.3
5V_EN  (via drill 0.3)
  Top 0.203: v52.4,41 53.38,41 U301.6 | v28.3,47.3 27.7,47.3 IC101.49
  Bottom 0.203: v52.4,41 49.4,44 49.4,47.2 48.1,48.5 29.5,48.5 v28.3,47.3
+5V  (via drill 0.3, 0.41)
  Top 0.305: 57.05,45.15 C319.1 57.4,44.9 57.7,45.2 59.2,45.2 v59.5,45.5 | v59.5,37.7 59.5,39.35 R315.2
  Top 0.406: 57.05,45.15 57.05,58.95 55.1,60.9 52.1,60.9 | R308.2 52.1,60.9 | Q303.2 23.71,79.14 R307.2 25.45,79.1 v40.4,79.1 | Q304.2 52.1,60.9 | 52.1,60.9 52.1,66 v52,66.1
  Bottom 0.203: SJ103.2 59.49,44.29 59.5,44.3
  Bottom 0.305: v59.5,45.5 59.5,44.3 v59.5,37.7
  Bottom 0.406: v52,66.1 43.8,66.1 41.3,68.6 41.3,78.2 v40.4,79.1
  pour Top (no thermals): 54.75,43.75 54.75,45.55 arc-90 54.95,45.75 57.75,45.75 arc-90 57.95,45.55 57.95,44.6 arc-90 57.75,44.4 56.85,44.4 arc-90 56.65,44.6 56.65,44.8 arc90 56.5,45 55.25,45 arc90 55.05,44.8 55.05,43.75
BAT_VOLT  (via drill 0.3)
  Top 0.203: C101.2 44.84,40.56 v44.8,40.6 | v33.5,47.6 33.5,49.5 v33.9,49.9 | IC101.62 21.9,50.69 21.9,51 21.3,51.6 21.3,52.9 v21.4,53
  Top 0.305: R102.2 R101.1 C101.2
  Bottom 0.203: v44.8,40.6 44.8,41.3 45.2,41.7 47.1,41.7 47.4,42 47.4,46.9 46.2,48.1 34,48.1 v33.5,47.6 | v33.9,49.9 28,49.9 26.2,48.1 25.3,48.1 22.5,50.9 22.5,52.5 22,53 v21.4,53
CO2_AOUT  (via drill 0.3)
  Top 0.203: v12.6,46.8 13.4,46.8 IC101.16
  Bottom 0.203: JP101.1 8.77,48.73 10.7,46.8 v12.6,46.8
CO_AOUT  (via drill 0.3)
  Top 0.203: R317.2 48.46,53.94 v48.4,54 | IC101.61 22.3,50.38 22.3,51.2 21.9,51.6 v21.9,52.2
  Top 0.305: R318.1 R317.2
  Bottom 0.203: v48.4,54 46.1,54 45.5,53.4 45.5,50 44.8,49.3 28,49.3 26.1,47.4 25.4,47.4 21.9,50.9 v21.9,52.2
CO_SW  (via drill 0.3)
  Top 0.203: R306.2 46.6,56.85 v46.6,50.9 | v28.3,48.3 28,48.3 IC101.50
  Top 0.305: R306.2 48.19,56.85 Q302.1
  Bottom 0.203: v46.6,50.9 46.6,49.6 45.9,48.9 28.9,48.9 v28.3,48.3
FB
  Top 0.305: U301.10 57.42,41.23 R313.2 R315.1
GND  (via drill 0.3, 0.41)
  Top 0.152: IC101.7 19.86,46.7 20.07,46.7 20.3,46.48 IC101.0
  Top 0.203: IC201.3 23.2,139.9 | IC201.1 21,139.8 | IC301.0 18.3,21.2 17.5,21.2 17.45,21.25 IC301.17 14.45,21.25 14.4,21.2 | IC301.5 19.75,27.05 19.4,27.4 19.4,27.9 | IC301.14 14.55,22.75 14.5,22.7 14.5,22.5 14.4,22.4 | IC301.20 14.15,19.75 14.1,19.7
  Top 0.305: U301.4 53.9,42.6 53.5,42.6 v53.4,42.7 | U301.9 54.9,42.2 U301.15 | IC201.14 35.3,141.65 35.5,141.45 35.5,140.45 v35.65,140.3 | IC301.29 18.25,16.05 18.2,16 18.1,15.7 18,15.5 18,15 | IC301.35 21.25,15.95 21.1,15.8 21.1,15.1 | IC301.14 14.35,22.75 14.1,22.5 13.3,22.5 | IC301.8 18.25,25.05 18,25.3 17.7,25.3 17.6,25.2 | IC301.42 23.55,20.25 23.6,20.2 23.7,20.2 23.8,20.1 | IC101.7 16.8,49.76 16.8,49.8 | IC101.22 15.4,42.07 15.4,41.9 15.2,41.7
  other vias: 56,138.8 41.5,139.7 42.8,139.7 7.6,11.85 7.6,12.75 7.6,13.65 7.6,14.55 7.6,15.45 7.6,16.35 1,38.55 23.1,139.6 5.1,74.15 48.1,5.95 49,5.95 49.9,5.95 49,6.95 49.9,6.95 13.3,6.35 11.3,6.35 9.3,6.35 10.8,12 12.3,12 13.8,12 11.55,12.75 13.05,12.75 10.8,13.5 9.55,13.5 9.55,14.25 11.55,14.25 13.05,14.25 12.3,13.5 13.8,13.4 10.8,15 12.3,15 11.55,15.75 10.8,16.5 9.55,16.5 34.9,38.8 34,38.8 34,37.9 34.9,37.9 38.3,42 38,41.1 38.3,40.2 36.9,41.1 30.15,50.85 30.15,51.85 30.15,52.85 29.75,40.25 30.55,40.25 30.15,39.45 31.05,39.45 29.75,38.65 30.65,38.65 31.55,38.65 47.75,9.85 49.25,9.85 49.25,8.45 44.55,9.85 45.75,9.85 45.15,10.65 48.45,10.65 38.75,57.85 39.95,57.85 41.15,57.85 39.95,55.15 39.95,54.25 40.95,55.15 40.95,54.25 37.75,57.85 42.15,57.85 54.4,42.7 55.4,42.7 50.7,40.9 49.8,40.9 49.8,40 50.7,40 49.8,39.1 50.7,39.1 48.9,40.9 48.9,40 48.9,39.1 56,40 56,39.1 56.8,38 57.8,38 61,41.5 61,40.6 61,39.7 61,38.8 25.5,138.8 26.3,138.8 25.5,138 26.3,138 25.1,157.8 25.9,157.8 26.7,157.8 27.5,157.8 28.3,157.8 32.1,157.8 32.9,157.8 32.1,158.6 32.9,158.6 20.8,139.6 20,139.6 19.2,139.6 18.4,139.6 17.7,147.5 17.7,146.7 17.7,145.9 17.7,145.1 17.7,144.3 43.7,40.5 43.7,41.4 42,39.2 42,38.3 41.1,44.2 42,44.2 42.9,44.2 42.9,43.4 42,43.4 41.1,43.4 28.55,41.75 24.65,66.35 25.55,66.35 26.45,66.35 55.25,160.25 52.4,135.8 52.4,136.8 52.4,137.8 52.4,138.8 56,161.5 54.5,161.5 53,161.5 51.5,161.5 50,161.5 48.5,161.5 47,161.5 45.5,161.5 44,161.5 36.5,161.5 53.75,160.25 52.25,160.25 50.75,160.25 49.25,160.25 8.75,160.25 8,161.5 9.5,161.5 11,161.5 10.25,160.25 1,142 1,140.5 1,139 1,137.5 1,136 1,134.5 1,133 1,131.5 1,130 1,128.5 1,127 1,125.5 1,124 1,122.5 1,121 1,119.5 1,118 1,116.5 1,115 1,113.5 1,112 1,110.5 1,109 1,107.5 1,106 1,104.5 1,103 1,101.5 1,100 1,98.5 1,97 1,95.5 1,94 1,92.5 1,91 1,89.5 1,88 1,86.5 1,85 1,83.5 1,82 1,80.5 1,79 1,77.5 1,76 1,74.5 1,73 1,71.5 1,70 1,68.5 1,67 1,65.5 1,64 1,62.5 1,61 1,59.5 1,58 1,56.5 1,55 1,53.5 1,52 1,50.5 1,49 1,47.5 1,46 1,44.5 1,43 1,41.5 1,40 1,38.5 1,37 1,35.5 63,38.55 63,142 63,140.5 63,139 63,137.5 63,136 63,134.5 63,133 63,131.5 63,130 63,128.5 63,127 63,125.5 63,124 63,122.5 63,121 63,119.5 63,118 63,116.5 63,115 63,113.5 63,112 63,110.5 63,109 63,107.5 63,106 63,104.5 63,103 63,101.5 63,100 63,98.5 63,97 63,95.5 63,94 63,92.5 63,91 63,89.5 63,88 63,86.5 63,85 63,83.5 63,82 63,80.5 63,79 63,77.5 63,76 63,74.5 63,73 63,71.5 63,70 63,68.5 63,67 63,65.5 63,64 63,62.5 63,61 63,59.5 63,58 63,56.5 63,55 63,53.5 63,52 63,50.5 63,49 63,47.5 63,46 63,44.5 63,43 63,41.5 63,40 63,38.5 63,37 63,35.5 14.8,6.35 14.8,7.85 14.8,9.35 14.8,10.85 8.3,5.35 10.3,5.35 12.3,5.35 14.3,5.35 38.3,28.35 39.3,28.35 40.3,28.35 41.3,28.35 42.3,28.35 13.2,156.2 13.2,157.1 13.2,158 13.5,159 14.5,159 13.2,155.3 12.3,158 18.7,158.3 18.7,157.4 19.6,157.4 15.5,159.8 16.5,159.8 12.3,157.1 12.3,156.2 12.3,155.3 13.2,154.4 14.2,155 14.2,154.1 18.7,159.2 19.6,158.3 21.7,12.3 22.3,12.9 22.9,13.6 23.5,14.3 14.6,26.4 15.5,26.4 15.5,25.5 14.6,25.5 14.6,24.6
  pour Bottom (rank 2): -5.5,0 69.5,0 69.5,178 -5.5,178
  pour Top (rank 2): -5.5,0 69.5,0 69.5,178 -5.5,178
  pour Top (no thermals): 19.5,160.3 21,160.3 21,158.7 19.5,158.7
  pour Top (no thermals): 24,160.3 25.5,160.3 25.5,158.7 24,158.7
  pour Top (no thermals): 28.5,160.3 30,160.3 30,158.7 28.5,158.7
  pour Top (no thermals): 33.9,162 33.9,160.8 35.6,160.8 35.6,162
  pour Top (no thermals): 9.25,6.6 7.95,6.6 7.95,6.9 8.3,6.9 8.3,6.95 8.9,6.95 8.9,6.9 9.25,6.9
  pour Top (no thermals): 9.55,6.6 9.55,6.9 9.9,6.9 9.9,6.95 10.5,6.95 10.5,6.9 10.9,6.9 10.9,6.6
  pour Top (no thermals): 9.55,11.1 9.55,11.4 10.85,11.4 10.85,11.1 10.5,11.1 10.5,11.05 9.9,11.05 9.9,11.1
  pour Top (no thermals): 9.05,11.75 9.05,13.2 10.1,13.2 10.1,11.8
  pour Top (no thermals): 9.05,14.7 9.05,16.1 10.1,16.1 10.1,14.7
  pour Top (no thermals): 49.7,41.6 49.7,43.8 51.65,43.8 51.95,43.5 56.4,43.5 56.4,43.8 58.2,43.8 58.2,41.9 52.1,41.9 52.1,41.6
LED1  (via drill 0.3)
  Top 0.203: v4.6,134.3 v4.6,138.9 | v10.5,37.1 13.26,37.1 IC101.26
  Bottom 0.203: R108.1 17.8,160.24 17.8,156.3 11.8,150.3 11.8,146.9 4.6,139.7 v4.6,138.9 | v4.6,134.3 3.5,133.2 3.5,42.6 9,37.1 v10.5,37.1
LED2  (via drill 0.3)
  Top 0.203: v3.5,134.3 v3.5,136.6 | v9.6,36.4 13.27,36.4 IC101.27
  Bottom 0.203: 30.46,156.1 R109.1 30.5,152.1 21.6,143.2 10.1,143.2 v3.5,136.6 | v3.5,134.3 3.1,133.9 3.1,42.4 9.1,36.4 v9.6,36.4
LED3  (via drill 0.3)
  Top 0.203: v10.5,35.7 13.28,35.7 IC101.28
  Bottom 0.203: R110.1 38.5,154.9 26.3,142.7 10.9,142.7 2.7,134.5 2.7,42.2 9.2,35.7 v10.5,35.7
LIPO_STAT
  Top 0.203: LED101.C 40.75,39.35 40.1,40 39.75,40 U102.1
MISO  (via drill 0.3)
  Top 0.203: IC102.8 28.8,65.26 28.8,63.5 30,62.3 v30,60.8 | v25.4,39.3 25.4,41.87 IC101.43 | v31.1,56.9 31.1,56.6 31.4,56.3 31.4,48.4 v30.4,47.4 | v22.5,16.9 IC301.37
  Bottom 0.203: v30,60.8 31.1,59.7 v31.1,56.9 | v30.4,47.4 30.4,47 30.8,46.6 30.8,45.4 29.9,44.5 29.2,44.5 25.4,40.7 v25.4,39.3 25.4,37.5 23.6,35.7 23.6,24.5 24.6,23.5 24.6,22.3 23.9,21.6 23.9,18 24.2,17.7 24.2,17 23.8,16.6 22.8,16.6 v22.5,16.9
MOSI  (via drill 0.3)
  Top 0.203: IC102.1 34.02,65.3 32.7,65.3 32.2,64.8 32.2,47.4 30.4,45.6 v29.4,45.6 | v24.2,39.3 24.2,41.65 IC101.41 | IC301.47 23.45,22.75 v23.6,22.9
  Bottom 0.203: v29.4,45.6 29.1,45.6 24.2,40.7 v24.2,39.3 24.2,37.5 22.8,36.1 22.8,23.3 23.2,22.9 v23.6,22.9
N$1
  Top 0.203: R118.1 29.4,70.3 28.8,69.7 IC102.5
N$2
  Bottom 0.406: R110.2 LED104.A
N$3
  Top 0.305: L302.1 C312.1 ANT301.1
N$4
  Bottom 0.406: R109.2 LED103.A
N$5
  Top 0.203: IC102.3 36.14,67.81 R120.1
N$6
  Top 0.203: IC301.24 15.5,15.92 J301.2
N$7
  Top 0.305: L302.2 C313.1 8.65,15.44 B301.1
N$8
  Top 0.203: IC301.23 14.85,18.25 14.6,18 14.6,14.82 J301.1
N$9
  Top 0.203: IC201.56 arc-90 20,152
  Top 0.6: IC201.56 19.5,152.05 19.5,152 18.75,152
  Top 0.813: 18.75,152 R206.1 R205.2
N$10
  Top 0.813: JP102.1 42.4,45.5 F101.2
N$11  (via drill 0.3)
  Top 0.305: U101.1 38.04,56.56 v38,56.6 | v42.1,56.6 40.95,56.6 U101.3
  Bottom 0.305: v38,56.6 v42.1,56.6
  pour Top (no thermals): 38.3,50.4 39.3,50.4 arc90 39.4,50.5 39.4,57.1 arc90 39.3,57.2 38.8,57.2 arc90 38.7,57.1 38.7,55.84 arc-45 38.67,55.77 38.33,55.43 arc45 38.3,55.36 38.3,54.14 arc-45 38.27,54.07 37.93,53.73 arc-45 37.86,53.7 37.6,53.7 arc90 37.5,53.6 37.5,52.14 arc45 37.53,52.07 38.17,51.43 arc-45 38.2,51.36 38.2,50.5 arc90
N$12
  Top 0.813: ANT201.D 15.9,153.84 R205.1
N$13
  Top 0.203: LED101.A 39.25,37.31 R106.2
N$14
  Top 0.406: U102.5 R107.1
N$15  (via drill 0.3)
  Top 0.203: v35,43.7 C112.1
  Bottom 0.203: SJ101.2 36.79,38.61 35,40.4 v35,43.7
  pour Top (no thermals): 32.4,42.9 33.66,42.9 arc-45 33.73,42.87 34.07,42.53 arc45 34.14,42.5 37.6,42.5 arc-90 37.7,42.4 37.7,41.8 arc-90 37.6,41.7 35.74,41.7 arc45 35.67,41.67 35.63,41.63 arc-45 35.56,41.6 34.15,41.6 arc50 34.07,41.56 33.63,41.04 arc-50 33.55,41 32.4,41 arc-90 32.3,41.1 32.3,42.8 arc-90
N$16  (via drill 0.3)
  Top 0.203: R106.1 v41.5,37
  Bottom 0.203: v41.5,37 39.4,37 38.9,37.5 SJ101.1
N$17
  Top 0.813: R206.2 15.5,152 arc-90 11,156.5 11,157 arc-90 15,161 20.24,161 arc90 C204.1
  pour Top (no thermals): 22,160.5 20,160.5 arc-90 19.75,160.75 19.75,161.25 arc-90 20,161.5 22,161.5 arc-90 22.25,161.25 22.25,160.75 arc-90
N$21
  Top 0.203: IC301.18 10.25,20.75 B301.4
N$22
  Top 0.203: IC301.19 10.25,20.25 B301.3
N$23
  pour Top (no thermals): 26.75,161.25 26.75,160.75 arc-90 26.5,160.5 23,160.5 arc-90 22.75,160.75 22.75,161.25 arc-90 23,161.5 26.5,161.5 arc-90
N$24
  Top 0.305: IC201.15 R204.1
N$25  (via drill 0.3)
  Top 0.305: IC201.2 v22.1,139.6 | 37.6,137.2 v37.6,136.9 37.6,138.3 37.15,138.76 R204.2
  Bottom 0.305: v22.1,139.6 22.1,137.1 22.2,137.1 23.5,135.8 36.5,135.8 v37.6,136.9
N$26
  Top 0.305: Q201.1 9.96,142.99 R207.2 9.91,141.55 T201.3
N$27
  Top 0.305: IC201.10 30.9,140.3 30.24,139.64 R201.1
N$28
  Top 0.305: IC201.11 32,139.5 TP1.P$1
N$29
  Top 0.305: IC201.18 TP2.P$1
N$30  (via drill 0.3)
  Top 0.203: IC201.13 34.2,140.6 34.55,140.25 v34.8,140.25 | 34.16,138.7 R203.1 v34.1,137.85
  Bottom 0.203: v34.1,137.85 34.1,139.55 v34.8,140.25
N$31
  Top 0.305: R202.1 IC201.12
N$32
  Top 1: L203.1 ANT202.1
  Top 1.016: ANT202.1 arc-90 ANT202.1
  pour Top (no thermals): 29.75,161.5 27.5,161.5 arc90 27.25,161.25 27.25,160.75 arc90 27.5,160.5 29.5,160.5 arc90 29.75,160.75
N$33  (via drill 0.8)
  Top 0.61: IC201.53 21.8,155.7 22.1,156 | Q201.3 10.8,147.1 11.6,147.9 12.64,147.9 C210.2
  Top 0.8: v17.6,149.7 D201.C
  Top 0.813: 22.1,156 v22.1,157.6
  Bottom 0.813: v22.1,157.6 22.1,151.5 20.3,149.7 v17.6,149.7
  pour Top (no thermals): 20.6,156.4 20.6,155 arc90 20.7,154.9 23.5,154.9 arc90 23.6,155 23.6,156.4 arc90 23.5,156.5 22.64,156.5 arc-45 22.57,156.53 22.53,156.57 arc-45 22.5,156.64 22.5,156.8 21.7,156.8 21.7,156.64 arc-45 21.67,156.57 21.63,156.53 arc-45 21.56,156.5 20.7,156.5 arc90
  pour Top (no thermals): 11.6,147.5 16.3,147.5 arc90 16.4,147.6 16.4,148.76 arc-45 16.43,148.83 16.87,149.27 arc-45 16.94,149.3 17.1,149.3 17.1,149.5 16.8,150 16.54,150 arc-45 16.47,150.03 16.43,150.07 arc45 16.36,150.1 15.6,150.1 arc90 15.5,150 15.5,148.3 arc-90 15.4,148.2 11.6,148.2 arc90
N$34
  Top 0.9: L204.2 ANT202.2
N$36
  Top 0.406: R314.2 60,71.5 58.5,73 SENS301.HB
N$42
  Bottom 0.406: R108.2 21.8,160.3 LED102.A
N$43
  Top 0.305: U301.3 54.4,45.6 L303.P$1
N$44
  Top 0.305: C318.1 56.4,44 56.2,44.2 55.42,44.2 U301.1
N$45
  Top 0.203: JP101.5 11.8,59 12.1,58.7 12.1,58.24 R122.2
N$46
  Top 0.203: JP101.3 10.52,56.46 R121.1
N$47
  Top 0.203: R111.2 LED105.A
N$48
  Top 0.305: R112.2 LED106.A
N$49
  Top 0.305: R113.2 LED107.A
N$50
  Top 0.305: SG101.- 46.45,34.75 46.1,35.1 T101.3
  Bottom 0.305: SJ102.1 46.4,26.85 SG101.-
N$51  (via drill 0.3)
  Top 0.203: v26.8,37.6 26.8,36.2 25.3,34.7 21.3,34.7 18.8,37.2 18.8,38.4 IC101.32
  Top 0.305: v44.3,31.8 T101.1
  Bottom 0.203: v26.8,37.6 33.1,37.6 38.9,31.8 v44.3,31.8
  Bottom 0.305: v44.3,31.8 46.39,31.8 SJ102.2
N$52
  cutout Top: 7,162 57,162 57,178 7,178
N$53
  cutout Bottom: 7,162 57,162 57,178 7,178
N$54  (via drill 0.8)
  Top 0.813: v31.4,24 F102.1
  Bottom 0.813: J106.CENTER_PIN 28.69,21.29 v31.4,24
N$55
  Top 0.305: D103.+ 41.72,9.88 40.9,10.7 R116.1
  Top 0.406: J105.P$1 45.7,5.4 45,6.1 44,6.1 43.4,6.7 C114.1
  Top 0.61: C114.1 D103.+
N$56
  Top 0.813: 35.62,31.15 D104.+ | Q102.2 35.6,31.13 D104.+ | D104.+ 39.51,31.18 C116.A
N$57
  cutout Top (no thermals): 7,11.1 9.9,11.1 9.9,11.05 10.5,11.05 10.5,11.1 14.3,11.1 14.3,6.9 10.5,6.9 10.5,6.95 9.9,6.95 9.9,6.9 8.9,6.9 8.9,6.95 8.3,6.95 8.3,6.9 7,6.9
N$58
  cutout Top (no thermals): 8.15,11.1 8.15,12.2 8.3,12.2 8.3,11.1
N$59
  cutout Top (no thermals): 8.9,11.1 8.9,12.2 9.05,12.2 9.05,11.1
N$60  (via drill 0.3)
  Top 0.203: IC101.59 23.5,50.17 v23.5,52.8 | v6.5,70.2 R103.1
  Bottom 0.203: v23.5,52.8 23.5,53.1 16.5,60.1 16,60.1 15.6,60.5 15.6,66.9 14.1,68.4 8.3,68.4 v6.5,70.2
N$61  (via drill 0.3)
  Top 0.203: IC101.60 23,50.38 23,52.3 22.7,52.6 22.7,53 v22,53.7 | v11.1,67.6 11.1,72.5 8.7,74.9 7.54,74.9 R104.2
  Bottom 0.203: v22,53.7 21.9,53.8 21.9,54.1 16.3,59.7 15.8,59.7 15.2,60.3 15.2,66.7 13.9,68 11.5,68 v11.1,67.6
N$62
  Top 0.813: Q102.3 F102.2
N$64  (via drill 0.3)
  Top 0.305: v30.3,35.6 30.3,34.59 R113.1
  Bottom 0.305: SJ105.1 v30.3,35.6
N$65  (via drill 0.3)
  Top 0.305: v35.2,60.1 R112.1
  Bottom 0.305: SJ104.1 35.19,60.09 v35.2,60.1
N$66  (via drill 0.3)
  Top 0.203: v58.4,47.1 R111.1
  Bottom 0.203: SJ103.1 57.8,46.5 v58.4,47.1
N$67
  Top 0.406: C317.1 47.76,63 Q304.3
  Top 0.61: SENS301.A2 50.1,68.2 Q304.3
  Top 0.813: SENS301.A1 47.25,74.95 SENS301.HA 47.25,71.05 SENS301.A2
N$68
  Top 0.305: R308.1 50.94,58.26 50.3,58.9 Q302.3
  Top 0.406: C317.2 47.7,61.3 48.2,60.8 49.05,60.8 Q304.1
  Top 0.61: Q302.3 49.2,60.85 Q304.1
N$70
  Top 0.406: C315.2 21.55,79.2 Q303.1 21.75,77.75 Q301.3 24.84,77.7 R307.1
N$71
  Top 0.305: IC301.43 24.59,20.75 C311.1
N$72
  Top 0.305: IC301.30 18.75,15.39 C309.1
N$73
  Top 0.305: IC301.7 18.75,25.59 C307.1
N$74
  Top 0.203: IC301.1 24.68,24 X301.1 25,24.18 25,24.4 26.1,24.4 C302.2
N$75
  Top 0.203: IC301.2 21.25,25.15 22.3,26.2 23.16,26.2 C303.1 24.45,26.24 24.7,26.5 X301.2
  Top 0.305: 23.14,26.2 C303.1
N$76
  Top 0.305: IC301.6 19.25,26.85 L301.1 18.54,27.84 C301.1
N$77
  Top 0.305: IC301.3 20.75,25.85 22.75,27.85 X302.1 23.49,28.25 C304.1
N$78
  Top 0.305: IC301.4 20.25,26.05 21.4,27.2 21.4,30.6 20.7,31.3 20.7,31.5 | 20.7,31.5 20.7,31.7 X302.3 | C306.1 20.64,31.55 20.7,31.5
N$83
  Top 0.406: JP301.3 12.58,87.02 18.2,81.4 20.24,81.4 C315.1 22.66,81.34 Q303.3
N$88
  Top 0.203: IC101.55 25.75,49.59 C108.2
N$89
  Top 0.305: IC101.8 15.78,50.08 L101.1 15.28,50.35 C102.1
N$90
  Top 0.203: IC101.1 20.3,51.56 20.3,54.8 20.98,55.48 X101.1 21.51,55.58 C103.2
N$91
  Top 0.203: IC101.2 18.41,51.68 C104.1 19.1,52.87 19.1,53 18.82,53.28 X101.2
N$97  (via drill 0.3)
  Top 0.305: v51.4,54.1 50.5,53.2 50.5,52.04 R316.2
  Top 0.406: R317.1 R316.2 C320.1
  Bottom 0.305: SENS301.B2 55.35,58.05 v51.4,54.1
  Bottom 0.61: SENS301.B1 SENS301.B2
N$98  (via drill 0.3)
  Top 0.305: v15.9,78.6 15.9,75.14 R309.1
  Bottom 0.305: JP301.4 15.12,79.38 v15.9,78.6
N$99
  Top 0.305: JP301.2 10.04,80.16 12.1,78.1 12.1,75.16 R311.1
N$404
  cutout Bottom (no thermals): 7,11.1 7,6.9 14.3,6.9 14.3,11.1
  cutout Bottom (no thermals): 21.5,0 26.5,0 26.5,9 21.5,9
  cutout Bottom (no thermals): 37.5,0 42.5,0 42.5,9 37.5,9
PM_P1  (via drill 0.3)
  Top 0.203: IC101.13 15.3,47.02 15.3,48.2 v15.5,48.4 | v12.5,65.9 12.5,71.6 13,72.1 13,73.96 R312.1
  Top 0.305: R311.2 R312.1
  Bottom 0.203: v15.5,48.4 15.5,49.9 13.7,51.7 13.7,64.2 14,64.5 14,65.5 13.6,65.9 v12.5,65.9
PM_P2  (via drill 0.3)
  Top 0.203: IC101.14 14.7,46.91 v14.7,47.5 | v13.3,65 13.3,70.1 15.1,71.9 15.1,73.96 R310.1
  Top 0.305: R309.2 R310.1
  Bottom 0.203: v14.7,47.5 14.7,50.1 13.3,51.5 v13.3,65
PM_SW  (via drill 0.3)
  Top 0.203: IC101.64 21,51.2 20.8,51.4 20.8,53.5 25.4,58.1 v25.4,64.8 | v20.8,73.2 20.8,75.55 Q301.1
  Top 0.406: R303.2 20.8,75.56 Q301.1
  Bottom 0.203: v25.4,64.8 23.5,64.8 22.9,65.4 22.9,71.1 v20.8,73.2
RESET_D21
  Top 0.305: CN101.10 17.29,68.54 R114.2 R115.1
RESET_R21
  Top 0.203: CN301.10 20.14,2.23 19.8,1.9 16.9,1.9 16.3,2.5 16.3,11.5 16.9,12.1 18.04,12.1 R301.2 R302.1
RESETN_D21  (via drill 0.3)
  Top 0.203: v16.4,60.8 16.4,67.36 R115.2 | IC101.52 28.7,50.42 v28.7,51.7
  Bottom 0.203: v16.4,60.8 25.15,52.05 25.2,52 25.5,51.7 v28.7,51.7
RESETN_R21
  Top 0.203: R302.2 22.26,11.15 25,13.9 25,18.1 23.85,19.25 IC301.40
RXD0  (via drill 0.3)
  Top 0.203: R104.1 v7.5,72.8 | J101.2 8.12,84.48 5.8,86.8 5.8,112.5 21.9,128.6 32.2,128.6 34.65,131.05 IC204.4
  Bottom 0.203: v7.5,72.8 7.5,76 8.1,76.6 8.1,78.08 J101.2
RXD1  (via drill 0.3)
  Top 0.203: v12.2,55.7 12.2,57.15 R121.2 | v14.1,43.7 14.2,43.7 IC101.18
  Bottom 0.203: v12.2,55.7 12.2,49.1 14,47.3 14,43.8 v14.1,43.7
RXD_1V8
  Top 0.203: R203.2
  Top 0.305: R203.2 34.56,139.64 35.3,138.9 IC204.2
SCK  (via drill 0.3)
  Top 0.203: IC301.38 23.35,18.25 23.5,18.1 v23.5,17.5 | v24.8,38.6 24.8,41.76 IC101.42 | IC102.2 32.55,66.55 31.8,65.8 31.8,48 v30.1,46.3
  Bottom 0.203: v30.1,46.3 30.1,45.3 29.7,44.9 29,44.9 24.8,40.7 v24.8,38.6 24.8,37.5 23.2,35.9 23.2,24.3 24.2,23.3 24.2,22.5 23.5,21.8 v23.5,17.5
SCL
  Top 0.203: IC101.30 17.49,38.5 J104.2
SDA
  Top 0.203: IC101.29 16.06,37.77 J104.1
SH1
  Top 1: 43.4,4.5 J105.SH3 J105.SH4 50.6,3.33 J105.SH2 | L102.2 43.4,4.5 | 43.4,4.5 J105.SH1
SIM_CLK  (via drill 0.3)
  Top 0.305: IC201.38 37.5,157.8 38.2,158.5 46.9,158.5 49.9,155.5 49.9,136.76 D204.1 C209.2 49.1,135.7 48.4,135 v48.4,132.9
  Bottom 0.305: v48.4,132.9 46.88,132.9 U201.C3 46.77,132.8 43.1,132.8 41.16,130.87 IC202.6
SIM_DATA  (via drill 0.3)
  Top 0.305: C212.2 D205.1 v45,133.8 44.6,133.8 | IC201.39 36.4,158.2 37.2,159 47.1,159 50.4,155.7 50.4,141.9 v51.4,140.9
  Bottom 0.305: v51.4,140.9 54,138.3 54,132.4 53.1,131.5 50.2,131.5 | 50.2,131.5 46.91,131.5 U201.C7 | IC202.3 41.16,114.27 40.5,113.6 39,113.6 38.4,114.2 38.4,131.6 40.6,133.8 v45,133.8 49.4,133.8 50.1,133.1 50.1,131.6 50.2,131.5
SIM_RST  (via drill 0.3)
  Top 0.305: IC201.40 35.3,158.6 36.2,159.5 47.3,159.5 50.9,155.9 50.9,142.9 v52.1,141.7 | C207.2 D203.1 | 43.5,131.14 C207.2 | v42.44,124.23 42.44,128.53 43.4,129.5 43.4,131.16 C207.2
  Bottom 0.305: v52.1,141.7 54.5,139.3 54.5,131.9 52.9,130.3 43.84,130.3 U201.C2 | IC202.7 v42.44,124.23 42.4,124.27 42.4,129.7 43.02,130.31 U201.C2 | U201.C2 43.52,130.31
SIM_VDD  (via drill 0.3)
  Top 0.305: IC201.41 34.2,158.9 35.3,160 47.5,160 53.3,154.2 53.3,135 52.8,134.5 50.5,134.5 49.96,133.96 C203.2 C201.2 D202.1 49.96,128.46 v49.3,127.8 v49.3,120.6
  Bottom 0.305: v49.3,127.8 43.85,127.8 U201.C1 | IC202.8 v49.3,120.6
SS_DFLASH
  Top 0.203: R119.1 IC102.4 32.09,69.08 30.7,67.7 30.7,60.5 29.3,59.1 29.3,50.31 IC101.51
SS_R21  (via drill 0.3)
  Top 0.203: IC301.48 22.75,23.25 23,23.5 25.8,23.5 v26.1,23.2 | v26.7,39.6 26.7,41.27 IC101.44
  Bottom 0.203: v26.7,39.6 25.8,38.7 25.8,37.3 24,35.5 24,24.7 24.6,24.1 25.2,24.1 v26.1,23.2
SWCLK_D21  (via drill 0.3)
  Top 0.203: IC101.57 24.3,49.55 24.3,52.1 25.2,53 25.2,54.1 v25.5,54.4
  Bottom 0.203: CN101.4 19,64.8 18.4,64.8 18,64.4 18,61.5 25.1,54.4 v25.5,54.4
SWCLK_R21  (via drill 0.3)
  Top 0.203: IC301.45 26.15,21.75 v26.3,21.9 | v25.3,11.4 21.07,7.17 CN301.4
  Bottom 0.203: v26.3,21.9 26.3,21.8 25.9,21.4 25.9,12 v25.3,11.4
SWDIO_D21  (via drill 0.3)
  Top 0.203: IC101.58 23.9,49.86 23.9,52.3 24.8,53.2 24.8,55.5 v24.5,55.8
  Bottom 0.203: CN101.2 19.1,63.42 19.1,61.6 24.5,56.2 v24.5,55.8
SWDIO_R21  (via drill 0.3)
  Top 0.203: IC301.46 25.35,22.25 v25.5,22.4 | v25.1,12.5 21.04,8.44 CN301.2
  Bottom 0.203: v25.5,22.4 25.5,12.9 v25.1,12.5
TXD0
  Top 0.203: R103.2 6.5,75.9 6.1,76.3 6.1,78.08 J101.1 6.08,85.92 5.4,86.6 5.4,112.7 21.7,129 30.3,129 32.2,130.9 IC203.2
TXD1  (via drill 0.3)
  Top 0.203: v10.3,58.2 R122.1 | v13.9,42.8 14.01,42.8 IC101.19
  Bottom 0.203: v10.3,58.2 10.3,50.3 13.5,47.1 13.5,43.2 v13.9,42.8
TXD_1V8
  Top 0.305: R202.2 33.1,137.1 32.85,136.85 IC203.4
U2_ON  (via drill 0.3)
  Top 0.203: v7.4,135.3 T201.1 | v9.6,37.8 13.25,37.8 IC101.25
  Bottom 0.203: v7.4,135.3 3.9,131.8 3.9,42.8 8.9,37.8 v9.6,37.8
USB_D+
  Top 0.305: J201.3 46.74,139.66 46,140.4 46,150.1 45.2,150.9 44,150.9 IC201.29
USB_D-
  Top 0.305: J201.2 45.47,149.33 45,149.8 44,149.8 IC201.28
USB_N
  Top 0.203: J105.P$2 46.35,5.23 46.5,5.38 46.5,7.2 | 46.5,7.2 46.5,16.93 arc90 41.75,21.67 32.15,21.67 arc-90 27.92,25.9 27.92,40.65 arc49 27.73,41.07 25.72,43.07 25.72,43.08 25.19,43.61 IC101.45 | Z102.2 46.5,7.2
USB_P
  Top 0.152: 27.48,41.83
  Top 0.203: J105.P$3 47,5.23 46.85,5.38 46.85,7.2 | 46.85,7.2 46.85,16.93 arc90 41.75,22.03 32.15,22.03 arc-90 28.28,25.9 28.28,40.65 arc48 27.97,41.33 27.48,41.83 25.98,43.33 25.96,43.34 25.43,43.88 IC101.46 | Z101.2 46.85,7.2
UVLO
  Top 0.305: U301.7 53.9,40.65 52.75,39.5 52.55,39.5 C316.2 R304.1 R305.2
V_BATT  (via drill 0.3, 0.6)
  Top 0.305: U301.8 54.4,40.45 54.05,40.1 54.05,39.3 C316.1 | U301.5 52.62,44.17 51,45.8 48.7,45.8 48,45.1 v48,40.5 | v55.7,37.3 54.1,37.3 R304.2 | R101.2 43.2,38.3 42.8,38.7 42.8,41.7 42.4,42.1 41.74,42.1 C113.1
  Top 0.406: C316.1 R304.2 54,31.4 52.95,30.35 SG101.+
  Top 0.6: 45.2,48.8 v45.2,72.2
  Top 0.61: v10.8,138.1 10.8,140.3 11,140.5 11,141.34 R207.1
  Top 0.813: L303.P$2 53.7,48.8 45.2,48.8 Q101.3 F101.1
  Bottom 0.305: v48,40.5 48,38.3 49.1,37.2 55.6,37.2 v55.7,37.3
  Bottom 0.6: 40.9,97.8 45.2,93.5 v45.2,72.2
  Bottom 0.61: 40.9,97.8 10.8,127.9 v10.8,138.1
  pour Top (no thermals): 39,46.5 39,41.8 arc90 39.1,41.7 40.86,41.7 arc-45 40.93,41.67 41.07,41.53 arc45 41.14,41.5 42.1,41.5 arc90 42.2,41.6 42.2,42.5 arc90 42.1,42.6 40.94,42.6 arc-45 40.87,42.63 40.23,43.27 arc-45 40.2,43.34 40.2,46.5
  pour Top (no thermals): 50,49.2 50,44.7 51.3,44.7 52.3,43.7 53.55,43.7 53.55,44.6 53,44.6 52.6,45 52.6,47.3 53.2,47.9 54.6,47.9 54.6,49.2
  pour Top (no thermals): 10.5,141.5 10.5,141.7 arc-90 10.7,141.9 11,141.9 arc90 11.2,142.1 11.2,143.4 arc-90 11.4,143.6 15.9,143.6 arc-90 16.1,143.4 16.1,142.3 16.1,139.8 arc-90 15.9,139.6 10.7,139.6 arc-90 10.5,139.8
VBUS_DETECT  (via drill 0.3)
  Top 0.203: R117.1 v39.8,17.5 | v25.3,33.8 21.6,33.8 18.4,37 18.4,38.7 IC101.31
  Top 0.305: R117.1 R116.2
  Bottom 0.203: v39.8,17.5 39.8,20.1 27.7,32.2 26.9,32.2 v25.3,33.8
VREF
  Top 0.203: J103.2 15.58,53.1 IC101.4
VUSB
  Top 0.305: J201.1 39.4,138.4 38.6,139.2 IC201.17

## Text on the board
tPlace: SWD D21 | GND | VREF | 3.3V | 5V Boost | LIPO | SDA | SCL | 5V | SWD R21
bPlace: Household Air Polution Module (HAP) | Rev. 4a | Designed by | Gregory Knauff (M2M4ALL) | 3.3V LED | + | - | 5V BOOST LED | CH_LED | 5V LED | SPK_SHORT
Reference: PM Sensor | 58.5x45.2x19mm | Battery / 30x20x5mm | CO2 Sensor | Diameter: 40mm | CO Sensor | Height: 9mm | Height: 22mm